# Altium PCB PCB1.PcbDoc (part 2 of 7)
Units mm, origin at the board's own origin, x right, y up, seen from the top; angles counter-clockwise.
Board outline 168 x 107.92 mm, 4 copper layers (Top Layer, POWER_LAYER, GND_LAYER, Bottom Layer), stack 1.182 mm thick; 507 components, 566 nets, 2495 pads, 1244 vias.
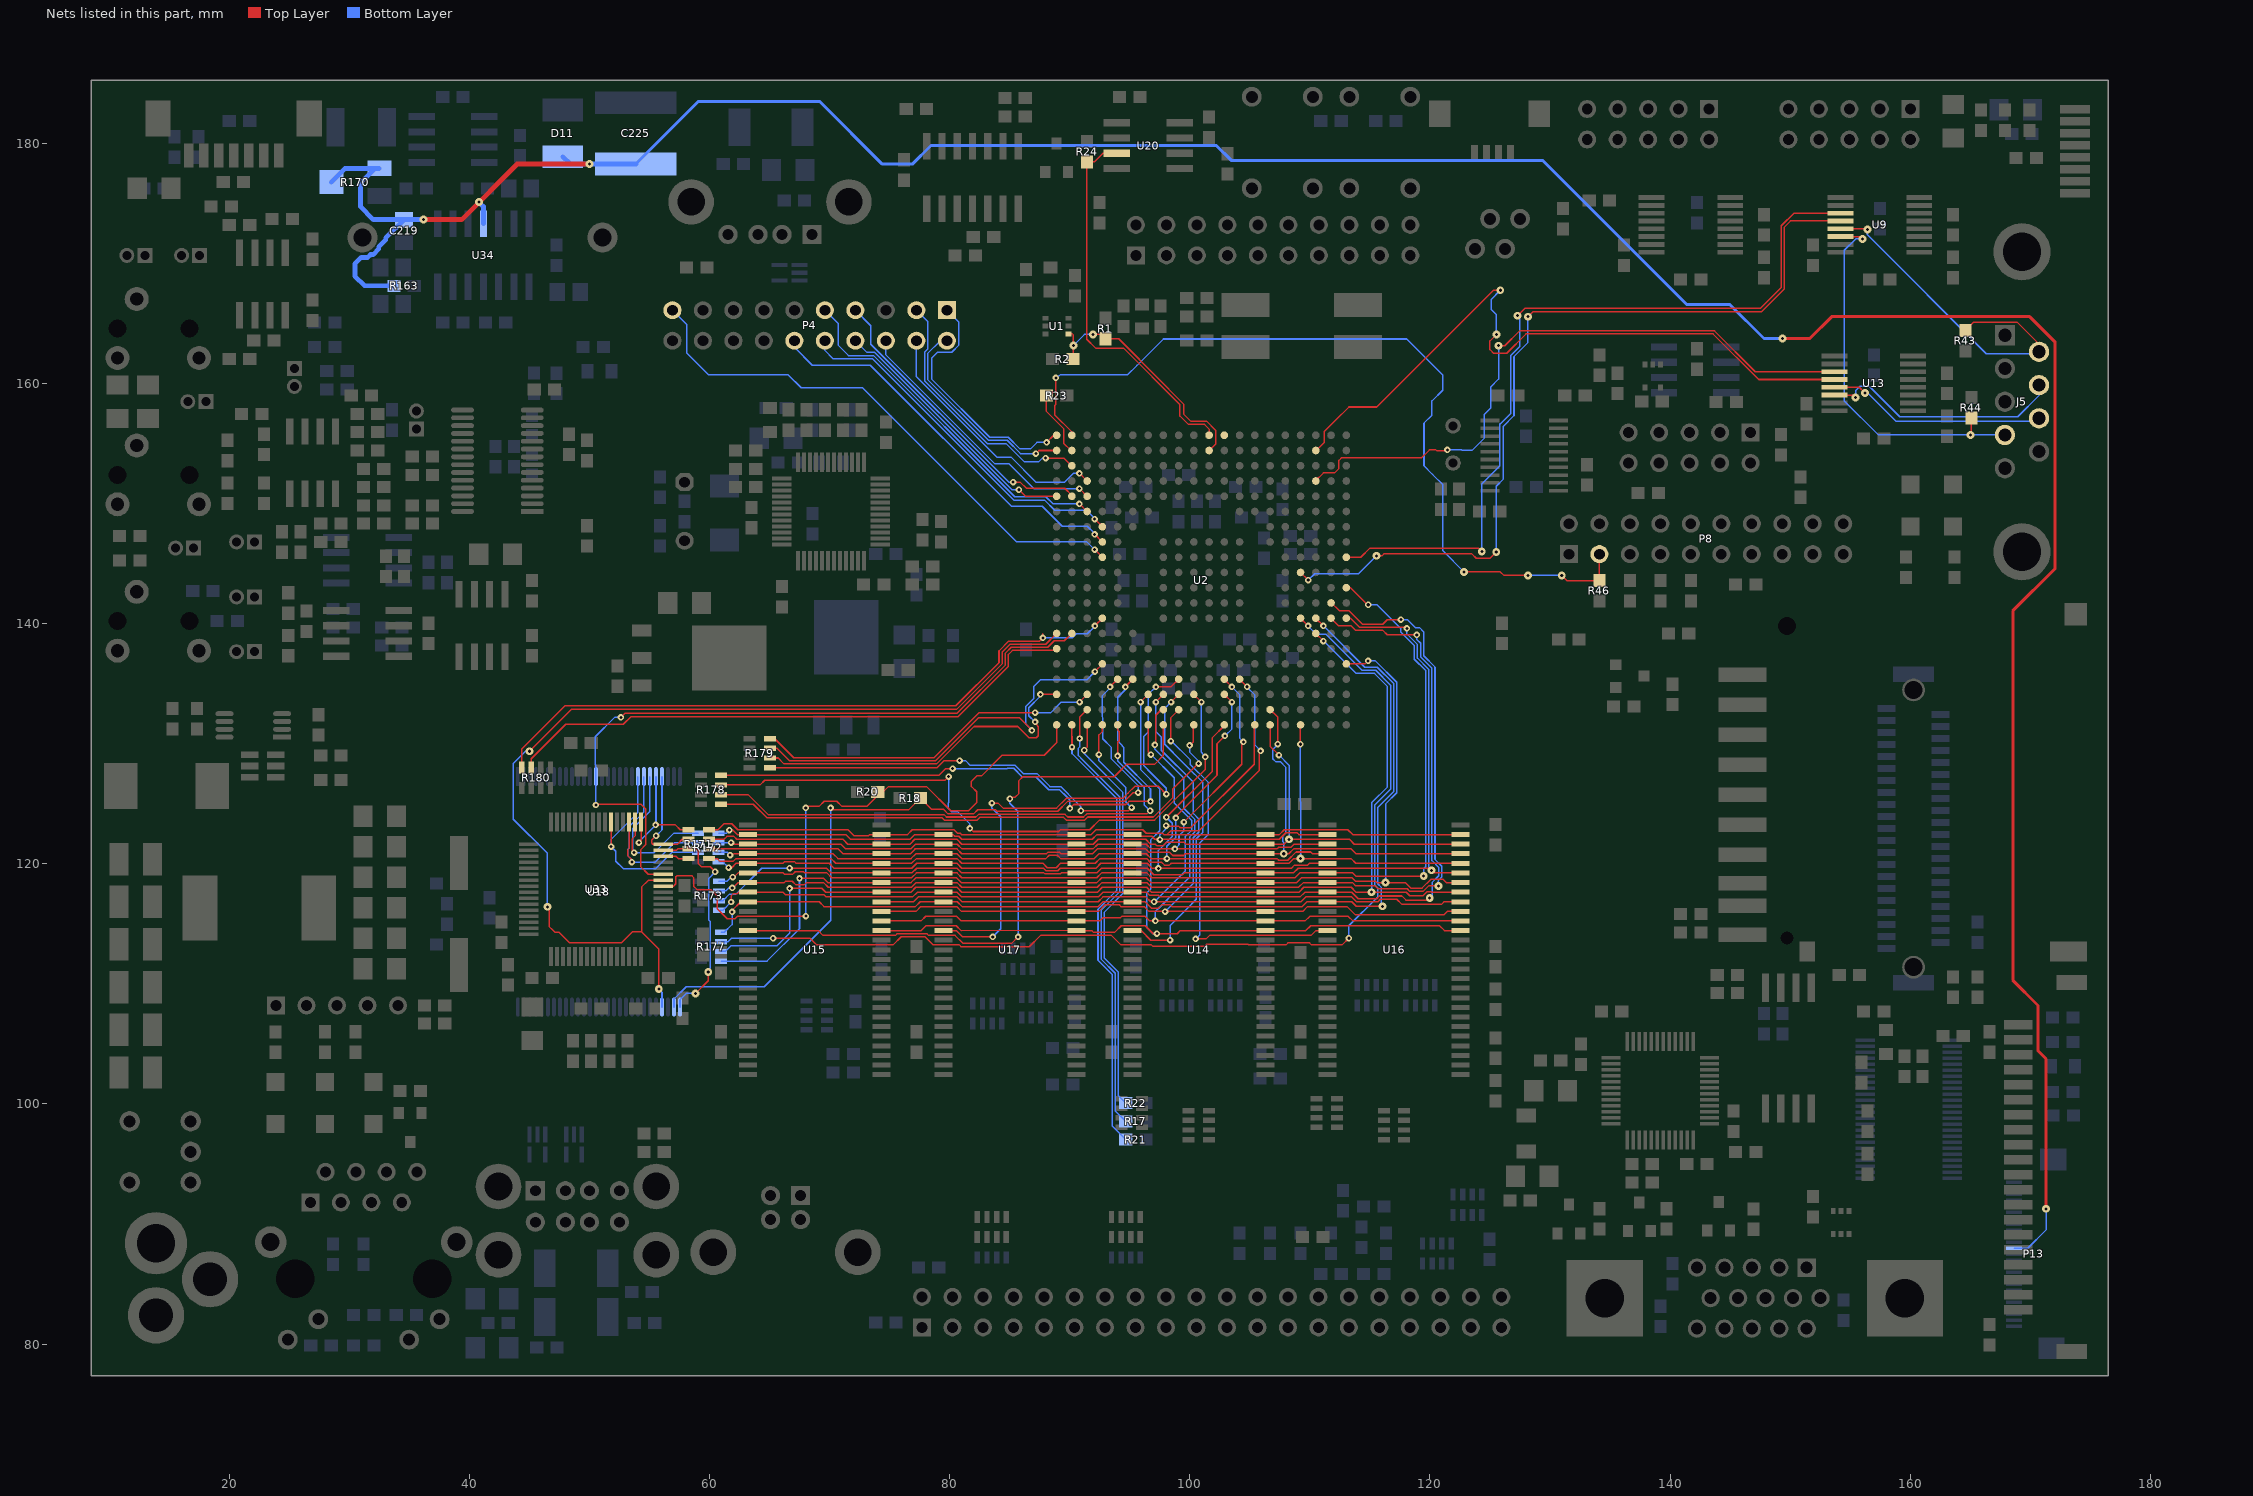
[diagram p4: the nets of this part, all layers, seen from the top]

## Footprints (in the part's own frame and the unit in brackets; to place one, negate y for a bottom-side part, rotate by r counter-clockwise, add the part's x,y. Pads: shape width x height; smd on the part's side, far side on the other; paste and mask are expansions set on the pad) (continued)
M08A [mm]
  rect 0.6x2.2 smd: 1(0.75,-3.25) 2(2.02,-3.25) 3(3.29,-3.25) 4(4.56,-3.25) 5(4.56,1.95) 6(3.29,1.95) 7(2.02,1.95) 8(0.75,1.95)
  silkscreen extent -0.23,-3.37 5.16,0.45
Micro6 [mm]
  rect 0.55x1.45 smd: 1(0.2,-2) 2(1.15,-2) 3(2.1,-2) 4(2.1,0.15) 5(1.15,0.15) 6(0.2,0.15)
  silkscreen extent -0.42,-2.28 2.7,-0.02
miniSMDC050 [mm]
  rect 1.8x3.15 smd: 1(0,0) 2(5.25,0)
  silkscreen extent 1.2,-1.45 4.05,1.45
MSOP8 [mm]
  rect 1.5x0.41 smd: 1(0,0)
  oval 1.5x0.41 smd: 2(0,-0.65) 3(0,-1.3) 4(0,-1.95) 5(4.8,-1.95) 6(4.8,-1.3) 7(4.8,-0.65) 8(4.8,0)
  silkscreen extent 1.39,-2.28 3.41,0.33
NSO8 [mm] "Small Outline; 8 Leads; Body Width 3.9 mm; Pitch 1.27 mm"
  rect 0.6x2.2 smd: 1(-1.905,-2.6) 2(-0.635,-2.6) 3(0.635,-2.6) 4(1.905,-2.6) 5(1.905,2.6) 6(0.635,2.6) 7(-0.635,2.6) 8(-1.905,2.6)
  silkscreen extent -2.88,-2.72 2.5,1.1
POT4MM-2 [mm] "Square Trimming Potentiometer"
  rect 2x1.3 smd: CCW(-2,-1.15) CW(-2,1.15)
  rect 2x2 smd: W(2,0)
  silkscreen extent -2.5,-2.5 2.5,2.5
PST-71AR1 [mm]
  round 1.7 hole 1: 1(-7.62,2.54) 2(-5.08,2.54) 3(-2.54,2.54) 4(-2.54,-2.54) 5(-7.62,-2.54)
  silkscreen extent -9.14,-6.35 -1.02,2.54
SC88 [mm]
  rect 0.4x0.5 smd: 1(-2.5,-0.15) 2(-1.85,-0.15) 3(-1.2,-0.15) 4(-1.2,1.75) 5(-1.85,1.75) 6(-2.5,1.75)
  silkscreen extent -3.02,-0.33 -0.7,1.52
SC88A [mm]
  rect 0.4x0.5 smd: 1(-5.1,-0.05) 2(-4.45,-0.05) 3(-3.8,-0.05) 4(-3.8,1.85) 5(-5.1,1.85)
  silkscreen extent -5.62,-0.22 -3.3,1.63
SCDA_NO2 [mm]
  rect 1.2x4 smd: 1(-0.659,-17.025) 2(1.841,-17.025) 3(4.341,-17.025) 4(6.841,-17.025) 5(9.341,-17.025) 6(11.841,-17.025) 7(14.191,-17.025) 8(16.091,-17.025) 9(-3.159,-17.025) 10(18.491,-17.025)
  rect 1.65x1.3 smd: 11(19.891,-11.625)
  rect 1.7x3.1 smd: 12(19.891,10.125)
  rect 1.9x1.9 smd: 13(-8.209,10.725)
  round 1.2 hole 1.5 unplated: SYSPAD14(-7.239,-13.335)
  round 0.8 hole 1.1 unplated: SYSPAD15(18.761,-13.335)
  silkscreen extent -8.56,-18.75 20.44,12.48
SO-G8/D6.6 [mm] "Small Outline; 8 Leads; Body Width 6.5 mm; Pitch 1.27 mm"
  rect 0.6x2.35 smd: 1(-1.905,-5.025) 2(-0.635,-5.025) 3(0.635,-5.025) 4(1.905,-5.025) 5(1.905,5.025) 6(0.635,5.025) 7(-0.635,5.025) 8(-1.905,5.025)
  silkscreen extent -3.3,-5.15 3.3,3.45
SOIC8N [mm] "Small Outline; 8 Leads; Body Width 3.9 mm; Pitch 1.27 mm"
  rect 0.6x2.2 smd: 1(-1.905,-2.625) 2(-0.635,-2.625) 3(0.635,-2.625) 4(1.905,-2.625) 5(1.905,2.625) 6(0.635,2.625) 7(-0.635,2.625) 8(-1.905,2.625)
  silkscreen extent -2.88,-2.79 2.5,1.13
SOT23 [mm] "SOT-23; 3 Leads; Body 3.0 x 2.5 mm, inc. leads (LxW max)"
  rect 0.85x1 smd: 1(-0.95,-1.2) 2(0.95,-1.2) 3(0,1.2)
  silkscreen extent -2.05,-1.32 1.27,1.2
SOT353 [mm]
  rect 0.35x1.35 smd: 1(-3.266,1.613) 2(-2.616,1.613) 3(-1.966,1.613) 4(-1.966,3.263) 5(-3.266,3.263)
  silkscreen extent -3.79,1.29 -1.47,3.14
SOT-23 [mm] "SOT-23; 3 Leads; Body 3.1 x 2.5 mm, inc. leads (LxW max)"
  rect 0.9x0.95 smd: 1(-0.95,-1.175) 2(0.95,-1.175) 3(0,1.175)
  silkscreen extent -2.07,-1.3 1.3,1.18
SSOP16 [mm] "SSOP; 16 Leads; Body Width 5.3 mm; Pitch 0.65 mm"
  rect 0.4x2.15 smd: 1(-2.275,-3.275) 2(-1.625,-3.275) 3(-0.975,-3.275) 4(-0.325,-3.275) 5(0.325,-3.275) 6(0.975,-3.275) 7(1.625,-3.275) 8(2.275,-3.275) 9(2.275,3.275) 10(1.625,3.275) 11(0.975,3.275) 12(0.325,3.275) 13(-0.325,3.275) 14(-0.975,3.275) 15(-1.625,3.275) 16(-2.275,3.275)
  silkscreen extent -3.25,-3.4 3.25,1.8
ST023 [mm]
  round 2 hole 1.1: 1(-4.99,2.54) 2(-4.99,-4.26) 3(-0.09,0.94)
  round 1.2 hole 1.5 unplated: MH1(-2.54,2.54) MH2(-2.54,-3.46)
  silkscreen extent -5.54,-5.46 0.46,3.74
SWBUTDIP4 [mm]
  round 1.65 hole 1: 1(0,0) 2(0,-5.08) 3(7.62,-5.08) 4(7.62,0)
  silkscreen extent 1.71,-5.02 5.91,0.04
TFDU_8PIN [mm]
  rect 0.7x2.5 smd: 1(-5,0) 2(-4,0) 3(-3,0) 4(-2,0) 5(-1,0) 6(0,0) 7(1,0) 8(2,0)
  silkscreen extent -6,-1 3,2.12
"TO-252-2 (D-PAK)" [mm]
  rect 1x1.6 smd: 1(0,0) 2(2.285,0) 3(4.57,0)
  rect 5.4x6.2 smd: 4(2.285,7.3)
  silkscreen extent -0.8,-0.7 5.37,10.3
TSOP28 [mm]
  rect 1.9x0.4 smd: 1(0,0)
  oval 1.9x0.4 smd: 2(0,-0.65) 3(0,-1.3) 4(0,-1.95) 5(0,-2.6) 6(0,-3.25) 7(0,-3.9) 8(0,-4.55) 9(0,-5.2) 10(0,-5.85) 11(0,-6.5) 12(0,-7.15) 13(0,-7.8) 14(0,-8.45) 15(5.8,-8.45) 16(5.8,-7.8) 17(5.8,-7.15) 18(5.8,-6.5) 19(5.8,-5.85) 20(5.8,-5.2) 21(5.8,-4.55) 22(5.8,-3.9) 23(5.8,-3.25) 24(5.8,-2.6) 25(5.8,-1.95) 26(5.8,-1.3) 27(5.8,-0.65) 28(5.8,0)
  silkscreen extent 1.78,-8.77 4.01,0.33
TSOP56 [mm]
  rect 1.6x0.3 smd: 1(0,0)
  oval 1.6x0.3 smd: 2(0,-0.5) 3(0,-1) 4(0,-1.5) 5(0,-2) 6(0,-2.5) 7(0,-3) 8(0,-3.5) 9(0,-4) 10(0,-4.5) 11(0,-5) 12(0,-5.5) 13(0,-6) 14(0,-6.5) 15(0,-7) 16(0,-7.5) 17(0,-8) 18(0,-8.5) 19(0,-9) 20(0,-9.5) 21(0,-10) 22(0,-10.5) 23(0,-11) 24(0,-11.5) 25(0,-12) 26(0,-12.5) 27(0,-13) 28(0,-13.5) 29(19.2,-13.5) 30(19.2,-13) 31(19.2,-12.5) 32(19.2,-12) 33(19.2,-11.5) 34(19.2,-11) 35(19.2,-10.5) 36(19.2,-10) 37(19.2,-9.5) 38(19.2,-9) 39(19.2,-8.5) 40(19.2,-8) 41(19.2,-7.5) 42(19.2,-7) 43(19.2,-6.5) 44(19.2,-6) 45(19.2,-5.5) 46(19.2,-5) 47(19.2,-4.5) 48(19.2,-4) 49(19.2,-3.5) 50(19.2,-3) 51(19.2,-2.5) 52(19.2,-2) 53(19.2,-1.5) 54(19.2,-1) 55(19.2,-0.5) 56(19.2,0)
  silkscreen extent 1.63,-13.75 17.56,0.25
TSSO12x8-48 [mm]
  rect 0.3x1.65 smd: 1(-5.25,-2.75) 2(-4.75,-2.75) 3(-4.25,-2.75) 4(-3.75,-2.75) 5(-3.25,-2.75) 6(-2.75,-2.75) 7(-2.25,-2.75) 8(-1.75,-2.75) 9(-1.25,-2.75) 10(-0.75,-2.75) 11(-0.25,-2.75) 12(0.25,-2.75) 13(0.75,-2.75) 14(1.25,-2.75) 15(1.75,-2.75) 16(2.25,-2.75) 17(2.75,-2.75) 18(3.25,-2.75) 19(3.75,-2.75) 20(4.25,-2.75) 21(4.75,-2.75) 22(5.25,-2.75) 23(5.75,-2.75) 24(6.25,-2.75) 25(6.25,4.5) 26(5.75,4.5) 27(5.25,4.5) 28(4.75,4.5) 29(4.25,4.5) 30(3.75,4.5) 31(3.25,4.5) 32(2.75,4.5) 33(2.25,4.5) 34(1.75,4.5) 35(1.25,4.5) 36(0.75,4.5) 37(0.25,4.5) 38(-0.25,4.5) 39(-0.75,4.5) 40(-1.25,4.5) 41(-1.75,4.5) 42(-2.25,4.5) 43(-2.75,4.5) 44(-3.25,4.5) 45(-3.75,4.5) 46(-4.25,4.5) 47(-4.75,4.5) 48(-5.25,4.5)
  silkscreen extent -6.07,-2.87 6.8,3.28
TSSOP2(0.44m) [mm]
  rect 0.416x1.5 smd: 1(-10.4,-5.55) 2(-9.6,-5.55) 3(-8.8,-5.55) 4(-8,-5.55) 5(-7.2,-5.55) 6(-6.4,-5.55) 7(-5.6,-5.55) 8(-4.8,-5.55) 9(-4,-5.55) 10(-3.2,-5.55) 11(-2.4,-5.55) 12(-1.6,-5.55) 13(-0.8,-5.55) 14(0,-5.55) 15(0.8,-5.55) 16(1.6,-5.55) 17(2.4,-5.55) 18(3.2,-5.55) 19(4,-5.55) 20(4.8,-5.55) 21(5.6,-5.55) 22(6.4,-5.55) 23(7.2,-5.55) 24(8,-5.55) 25(8.8,-5.55) 26(9.6,-5.55) 27(10.4,-5.55) 28(10.4,5.55) 29(9.6,5.55) 30(8.8,5.55) 31(8,5.55) 32(7.2,5.55) 33(6.4,5.55) 34(5.6,5.55) 35(4.8,5.55) 36(4,5.55) 37(3.2,5.55) 38(2.4,5.55) 39(1.6,5.55) 40(0.8,5.55) 41(0,5.55) 42(-0.8,5.55) 43(-1.6,5.55) 44(-2.4,5.55) 45(-3.2,5.55) 46(-4,5.55) 47(-4.8,5.55) 48(-5.6,5.55) 49(-6.4,5.55) 50(-7.2,5.55) 51(-8,5.55) 52(-8.8,5.55) 53(-9.6,5.55) 54(-10.4,5.55)
  silkscreen extent -11.33,-5.68 11.15,4.4
TSSOP20 [mm]
  rect 0.3x1.6 smd: 1(-2.5,-2.5) 2(-1.85,-2.5) 3(-1.2,-2.5) 4(-0.55,-2.5) 5(0.1,-2.5) 6(0.75,-2.5) 7(1.4,-2.5) 8(2.05,-2.5) 9(2.7,-2.5) 10(3.35,-2.5) 11(3.35,3.2) 12(2.7,3.2) 13(2.05,3.2) 14(1.4,3.2) 15(0.75,3.2) 16(0.1,3.2) 17(-0.55,3.2) 18(-1.2,3.2) 19(-1.85,3.2) 20(-2.5,3.2)
  silkscreen extent -3.32,-2.62 3.73,2

## Part data
B1: "CR2032 Battery holder"
C1 C2 C3 C4 C5 C8 C9 C10 C11 C12 C13 C14 C15 C16 C18 C19 C20 C21 C22 C24 C25 C26 C27 C28 C29 C30 C31 C32 C34 C35 C36 C37 C39 C40 C41 C42 C43 C45 C46 C47 C48 C51 C52 C53 C54 C55 C60 C61 C62 C65 C66 C71 C72 C75 C76 C77 C78 C79 C80 C81 C82 C83 C84 C85 C86 C87 C88 C89 C90 C91 C95 C96 C97 C98 C99 C100 C101 C102 C103 C104 C105 C106 C107 C108 C109 C110 C111 C112 C113 C114 C115 C116 C117 C118 C119 C120 C121 C122 C123 C124 C125 C126 C127 C128 C129 C130 C131 C132 C133 C135 C136 C137 C138 C139 C140 C141 C142 C143 C144 C145 C146 C149 C150 C151 C153 C154 C155 C156 C157 C158 C159 C160 C162 C165 C166 C167 C168 C171 C172 C173 C174 C175 C176 C177 C178 C183 C184 C185 C186 C187 C188 C189 C190 C191 C192 C194 C195 C196 C198 C199 C200 C201 C202 C203 C204 C205 C206 C207 C208 C209 C210 C212 C213 C214 C215 C216 C217 C218: library part C0603, "Ceramic Chip Capacitor - Standard"
C6 C17 C38 C49 C50 C56: library part C1210, "Ceramic Chip Capacitor - Standard"
C57 C58 C59 C63 C64 C67 C68 C69 C70 C73 C74 C92 C93 C94 C134 C152 C163 C164 C193 C197 C211: library part C1206, "Ceramic Chip Capacitor - Standard"
C147 C148 C161 C169 C170 C179 C180 C181 C182: library part "Cap Pol1", "Polarized Capacitor (Radial)"
C219 C220 C221 C222 C223 C225: "Polarized Capacitor (Surface Mount)"
C224: "Capacitor (Semiconductor SIM Model)"
D1 D2 D5 D6 D7: library part LED2, "Typical RED, GREEN, YELLOW, AMBER GaAs LED"
D3: library part 10MQ060N, "Schottky Rectifier"
D4: library part BAS40, "Schottky Barrier Diode"
D8 D9 D10: library part BAS40-04, "Schottky Barrier Double Diode"
D11: library part "D Schottky", "Schottky Diode"
F1 F2 F3: "miniSMDC050 Fuse component"
J1: "2.5mm Power Plug"
J2: "Molex 1.25 Wire to board"
J3: "USB 1.1, Right Angle, Thru-Hole, A Type, Receptacle, 4x4 Position, Stacked, Black"
J4: "USB 1.1, Right Angle, Thru-Hole, A Type, Receptacle, 4 Position, Black"
J5: "Receptacle Assembly, 9 Position, Right Angle"
J6: "Single RJ45 connector with integrated 10/100 BASE-TX magnetics and leds"
J7 J8 J9: library part PhoneJack, "3.5\" jack"
J10: "15pin DSUB High Density Female"
J11: library part KCAK4R, "Connector for ASTTouch Screen"
J12: "USB 1.1, Right Angle, Thru-Hole, B Type, Receptacle, 4 Position, Black"
J13: "FH12 Series, \"Flip-Lock\" SMT/ZIF Connector - 1.0mm Spaced Bottom Eccentric Contact"
J14: "1mm Pitch SMT VESA FPDI-1"
L1 L2 L4 L5 L6 L7 L8 L9: library part Inductor, "Inductor"
L3: library part CDRH127, "Sumida Power Inductor"
P2 P6 P7: "Header, 5-Pin, Dual row"
P3 P4 P8: "Header, 10-Pin, Dual row"
P5: "Header, 5-Pin"
P9: "Header, 20-Pin, Dual row"
P10: "Connector for SD Memory Card"
P12: "20PIN 1.25mm pitch"
Q1: "HEXFET Power MOSFET"
Q2: library part IRLML5103, "HEXFET Power MOSFET"
Q3: "NPN General-purpose Transistor"
R1 R2 R3 R4 R5 R6 R7 R8 R9 R10 R11 R12 R13 R14 R15 R16 R17 R18 R19 R20 R21 R22 R23 R24 R25 R26 R27 R28 R29 R30 R31 R32 R33 R34 R35 R36 R37 R38 R39 R40 R41 R42 R43 R44 R45 R46 R47 R48 R49 R50 R51 R52 R53 R54 R55 R56 R57 R58 R59 R60 R61 R62 R63 R64 R65 R66 R67 R68 R69 R70 R71 R72 R73 R77 R78 R79 R80 R81 R82 R83 R84 R85 R86 R87 R91 R92 R93 R94 R95 R96 R97 R98 R99 R100 R101 R102 R103 R104 R105 R106 R107 R108 R109 R110 R111 R112 R113 R114 R115 R116 R117 R118 R119 R120 R121 R122 R123 R124 R125 R126 R127 R128 R129 R130 R131 R132 R133 R134 R135 R136 R137 R138 R139 R140 R141 R142 R143 R144 R145 R146 R147 R148 R149 R150 R151 R152 R153 R154 R155 R156 R157 R158 R159 R160 R161 R162: library part Res3, "Resistor"
R74 R75 R76 R88 R89 R90 R171 R172 R173 R174 R175 R176 R177 R178 R179 R180 R181 R182 R183 R184 R185 R186 R187 R188 R189: library part CAY16-J4, "Chip Resistor Arrays"
R163 R164 R165 R166 R167 R168 R169: "Resistor"
R170: library part "RPot SM", "Square Trimming Potentiometer"
S2: "DIP Switch, 4 Position, SPST"
SW1 SW2: "DIP4 PushButton"
U1 U29: "TinyLogic UHS Dual Buffer"
U2: "32 Bit ARM920T Microcontroller with inegrated graphics, IDE, PCMCIA, Ethernet"
U3: "Serial Alarm Real-Time Clock"
U4: "Hysteretic PFET Buck Controller"
U5 U6: library part IRU1010, "1A low dropout positive fixed regulator"
U7 U9 U13: "±15kV ESD-Protected, 3.0V to 5.5V, Low-Power, up to 250kbps, True RS-232 Transceiver"
U8: "Fast Infrared Transceiver Module (FIR, 4 Mbit/s)"
U10 U11 U12: "EMI FILTER AND LINE TERMINATION  FOR USB DOWNSTREAM PORTS"
U14 U15 U16 U17: "32 Meg x 8 Synchronous DRAM"
U18: "Intel StrataFLASH"
U19: "MII PHY"
U20: library part DS1706LESA, "3.3 and 5.0 Volt MicroMonitor"
U21: "Quad 2-Input NAND Gate with Schmitt Trigger Inputs"
U22: "24-Bit, 192 kHz Stereo Audio CODEC"
U23: "3-Terminal Positive Regulator"
U24 U25 U27: library part MAX4242ESA, "Dual, +1.8V/10µA, SOT23, Beyond-the-Rails Op Amp"
U26: "Dual 105 mW Headphone Amplifier"
U28: "LVDS 18-Bit Color Flat Panel Display (FPD) Link"
U30: library part ADV7123, "Triple 10-Bit High Speed Video DAC"
U31: "TinyLogic UHS 2-Input OR Gate"
U32: "1Mbit High Speed SPI Serial Flash Memory"
U33: "Hi-Speed Universal Serial Bus peripheral controller"
U34: "Quad Low-Power Operational Amplifier"
U35: "DC-to-DC Converter Control Circuit"
Y1: library part QRZ_KX_MC, "QUARTZ CRYSTAL"
Y2 Y5: library part ECS-110-S-5P, "Crystal Oscillator"
Y3: library part QRZ_KX_12B, "QUARTZ CRYSTAL"
Y4: library part ECS-10-13-1, "Crystal Oscillator"

## Via types
v1: diameter 0.54, hole 0.254, Top Layer to Bottom Layer, tented both sides, 504 vias
v2: diameter 0.65, hole 0.254, Top Layer to Bottom Layer, 387 vias
v3: diameter 0.65, hole 0.254, Top Layer to Bottom Layer, tented both sides, 325 vias
v4: diameter 0.54, hole 0.254, Top Layer to Bottom Layer, 25 vias
v5: diameter 1.27, hole 0.75, Top Layer to Bottom Layer, 2 vias
v6: diameter 0.65, hole 0.254, Top Layer to Bottom Layer, tented bottom, 1 vias

## Nets (pads, with @x,y where several pads share a name; then routed paths per layer and width w, separated by ;. In a path a pad name is that pad's centre, name@x,y a point inside that pad or via, vN(x,y) a via of type N, cw(c..) or ccw(c..) an arc to the next point about the centre after c; other vN are vias at no path point)
25V: C219.1 C225.1 D11.2 P13.12 R163.2 R170.CW R170.W U34.4 | length 259.8
  Top Layer w0.25: v2(149.36,163.76) 151.64,163.76 153.46,165.58 169.96,165.58 172.08,163.46 172.08,144.6 168.556,141.076 168.556,110.304 170.66,108.2 170.66,104.42 171.32,103.76 v2(171.32,91.26)
  Top Layer w0.4: v2(36.17,173.67) 39.33,173.67 43.958,178.298 v2(49.98,178.298)
  Bottom Layer w0.127: P13.12@168.656,87.972 169.792,87.972 171.32,89.5 v2(171.32,91.26)
  Bottom Layer w0.25: C225.1@53.848,178.298 59.07,183.52 69.14,183.52 74.38,178.28 76.88,178.28 78.44,179.84 102.2,179.84 103.44,178.6 129.38,178.6 141.38,166.6 144.98,166.6 147.82,163.76 v2(149.36,163.76)
  Bottom Layer w0.4: R170.W@28.48,176.784 29.63,177.934 R170.CW@32.48,177.934 ; R170.CW@32.154,177.934 30.9,176.68 30.9,174.76 31.99,173.67 v2(36.17,173.67) v2@36.2,173.7 ; R163.2@33.694,168.148 31.252,168.148 30.44,168.96 30.44,169.98 30.98,170.52 31.52,170.52 31.75,170.75 31.97,170.75 32.439,171.219 32.439,171.393 33.02,171.974 33.02,172.146 C219.1@34.544,173.67 ; v2(40.78,175.12) 41.148,174.752 U34.4@41.148,173.313 ; D11.2@47.752,178.898 47.762,178.898 48.362,178.298 C225.1@53.848,178.298
#CAS: U2.H2 U14.17 U15.17 U16.17 U17.17 | length 70
  Top Layer w0.127: U15.17@74.302,115.24 77.6,115.24 78,115.64 80.56,115.64 80.96,115.24 U17.17@90.558,115.24 92.5,115.24 92.78,115.52 94.22,115.52 94.34,115.64 96.26,115.64 96.66,115.24 U14.17@106.306,115.24 109.6,115.24 110,115.64 113.18,115.64 113.58,115.24 U16.17@122.562,115.24 ; v1(97.08,129.9) 97.16,129.98 97.16,132.38 97.622,132.842 U2.H2@97.79,132.842
  Bottom Layer w0.127: v1(97.08,129.9) 97.08,129.56 99.492,127.148 99.492,124.629 100.42,123.701 100.42,122.678 100.008,122.266 100.008,118.928 98.82,117.74 ; v1(97.12,115.24) 97.12,116.02 97.484,116.384 98.83,117.73
#CS0: U2.M20 | length 0
  Top Layer w0.127: U2.M20@102.838,155.702 U2.M20@102.87,155.702
#CS1: R22.1 U2.C1 | length 34.3
  Top Layer w0.127: v1(91.2,129.46) 91.44,129.7 U2.C1@91.44,131.572
  Bottom Layer w0.127: v1(91.2,129.46) 91.2,129.18 91.8,128.58 ; 91.799,128.579 94.398,125.98 94.398,117.5 92.854,115.956 92.854,112.182 94.04,110.996 94.04,100.69 R22.1@94.654,100.076
#CS2: R21.1 U2.B1 | length 37.7
  Top Layer w0.127: U2.B1@90.17,131.572 v1(90.18,129.72)
  Bottom Layer w0.127: v1(90.18,129.72) 90.18,129.18 93.89,125.47 93.89,117.768 92.346,116.224 92.346,111.972 93.532,110.786 93.532,98.15 R21.1@94.654,97.028
#CS3: R17.1 U2.C2 | length 37.6
  Top Layer w0.127: v1(90.82,130.44) 90.82,132.24 91.422,132.842 U2.C2@91.44,132.842 U2.C2@91.44,132.76
  Bottom Layer w0.127: v1(90.82,130.44) 90.82,129.739 90.72,129.639 90.72,129.02 91.02,128.72 91.02,128.718 94.144,125.594 94.144,117.663 92.6,116.119 92.6,112.077 93.786,110.891 93.786,99.42 R17.1@94.654,98.552
#CS6: R18.1 U2.E4 U18.30 | length 64.4
  Top Layer w0.127: v1(70.08,124.66) 70.22,124.52 76.6,124.52 77.556,125.476 R18.1@77.558,125.476 78.502,124.532 79.488,124.532 79.86,124.16 81.98,124.16 82.32,124.5 83.8,124.5 83.92,124.38 88.998,124.38 89.815,125.196 94.536,125.196 95.28,125.94 v1(95.68,125.94) ; v1(93.35,134.744) 93.35,134.752 U2.E4@93.98,135.382
  Bottom Layer w0.127: U18.30@57.026,108.073 57.026,108.746 58.04,109.76 64.54,109.76 70.08,115.3 v1(70.08,124.66) ; v1(93.35,134.744) 93.35,134.65 92.72,134.02 92.74,130.42 93.46,129.7 93.46,128.74 95.68,126.52 v1(95.68,125.94)
#CS7: R20.1 U2.A1 U33.25 | length 52.5
  Top Layer w0.127: U33.25@56.13,118.137 56.977,118.137 57.18,118.34 57.18,118.92 57.28,119.02 58.5,119.02 58.66,118.86 58.66,118.14 58.94,117.86 60.08,117.86 60.62,117.32 60.62,116.26 61.46,115.42 62.1,115.42 62.32,115.64 v1(68.02,115.64) ; v1(68,124.66) 68.127,124.787 69.106,124.787 69.539,125.22 70.58,125.22 71.014,124.786 73.088,124.786 R20.1@74.002,125.7 ; R20.1@74.002,125.984 74.444,125.984 74.9,126.44 78.06,126.44 80.08,124.42 81.56,124.42 82.24,125.1 82.24,126 81.8,126.44 81.8,126.881 82.239,127.32 82.631,127.32 84.355,129.044 87.865,129.044 88.9,130.079 U2.A1@88.9,131.572
  Bottom Layer w0.127: v1(68,124.66) 68.02,123.96 v1(68.02,115.64)
#CTS0: U2.V19 U13.12 | length 58.1
  Top Layer w0.127: U2.V19@110.49,154.432 110.532,154.432 111.18,155.08 111.18,155.99 112.093,156.903 113.246,158.056 115.576,158.056 125.3,167.78 v3(125.86,167.78) ; v3(125.54,164.1) 125,163.56 125,162.84 125.3,162.54 126.4,162.54 127.998,164.138 143.588,164.138 147.381,160.345 U13.12@153.697,160.345
  Bottom Layer w0.127: v3(125.54,164.1) 125.54,165.741 125.1,166.181 125.1,167.02 v3(125.86,167.78)
#CTS0-RS232: J5.8 U13.13 | length 18.3
  Top Layer w0.127: U13.13@153.697,159.695 155.765,159.695 v3(156.24,159.22)
  Bottom Layer w0.127: v3(156.24,159.22) 156.46,159.22 158.8,156.88 170.505,156.88 J5.8@170.736,157.111
#DQM0: U2.J2 U16.39 | length 32.5
  Top Layer w0.127: v1(98.42,130.22) 98.42,132.18 99.06,132.82 U2.J2@99.06,132.842 ; v1(100.48,113.74) 101.34,113.74 101.64,114.04 110.1,114.04 110.5,114.44 U16.39@111.462,114.44
  Bottom Layer w0.127: v1@98.52,130.12 v1(98.42,130.22) 98.48,130.22 100.02,128.68 100.02,128.3 101.54,126.78 101.54,122.46 100.84,121.76 100.84,114.1 v1(100.48,113.74)
#DQM1: U2.J3 U14.39 | length 26.9
  Top Layer w0.127: U14.39@95.206,114.44 95.94,114.44 96.74,113.64 v1(98.36,113.64) ; v1(98.43,133.474) 98.43,133.482 U2.J3@99.06,134.112
  Bottom Layer w0.127: v1(98.36,113.64) 98.36,114.86 99.746,116.246 100.54,117.04 100.54,122.08 101.092,122.632 101.092,126.768 99.766,128.094 99.367,128.493 97.9,129.96 97.9,132.94 98.43,133.47 v1(98.43,133.474)
#DQM2: U2.J4 U17.39 | length 44.1
  Top Layer w0.127: U17.39@79.458,114.44 80.54,114.44 81.06,113.92 v1(83.58,113.92) ; v1(83.5,125.06) 84.02,125.06 84.44,124.64 88.899,124.64 89.71,125.45 94.41,125.45 94.851,125.891 94.854,125.891 95.426,126.464 97.376,126.464 v1(98.04,125.8) ; v1(97.16,134.74) 97.164,134.744 98.43,134.744 98.43,134.752 U2.J4@99.06,135.382
  Bottom Layer w0.127: v1(83.5,125.06) 83.5,124.66 84.246,123.914 84.246,114.586 v1(83.58,113.92) ; v1(97.16,134.74) 96.52,134.1 96.52,130.96 96.144,130.584 96.144,128.206 96.495,127.855 96.495,127.845 98.04,126.3 v1(98.04,125.8)
#DQM3: U2.H1 U15.39 | length 52.5
  Top Layer w0.127: U15.39@63.202,114.44 69.04,114.44 69.44,114.04 75.48,114.04 75.626,114.186 78.074,114.186 78.22,114.04 80.44,114.04 81.08,113.4 85.18,113.4 v1(85.7,113.92) ; v1(85,125.42) 85.14,125.56 85.452,125.56 85.76,125.868 85.76,126.94 86.08,127.26 93.7,127.26 94.37,127.93 ; 94.37,127.93 94.72,128.281 97.051,128.281 97.79,129.02 U2.H1@97.79,131.572
  Bottom Layer w0.127: v1(85,125.42) 85,125.041 85.66,124.381 85.66,124.34 v1(85.7,113.92)
#DSR0: U2.U11 U9.12 | length 70.9
  Top Layer w0.127: U2.U11@109.22,144.272 109.22,144.28 109.224,144.276 v1(109.86,143.64) ; v3(115.54,145.66) 116,145.66 116.16,145.82 123.5,145.82 123.86,145.46 125,145.46 v3(125.52,145.98) ; v3(128.16,165.58) 128.56,165.98 147.6,165.98 149.524,167.904 149.524,173.046 150.031,173.553 U9.12@154.205,173.553
  Bottom Layer w0.127: v1(109.86,143.64) 110.4,144.16 114.04,144.16 v3(115.54,145.66) ; v3(125.52,145.98) 125.52,151.46 126.12,152.06 126.12,156.46 127,157.34 127,162.26 128.16,163.42 v3(128.16,165.58)
#DSR0-RS232: J5.6 R43.2 U9.13 | length 29
  Top Layer w0.127: U9.13@154.205,172.903 156.377,172.903 v3(156.44,172.84) ; R43.2@164.592,164.426 165.266,165.1 168.942,165.1 170.736,163.306 J5.6@170.736,162.651
  Bottom Layer w0.127: v3(156.44,172.84) 156.44,172.4 166.34,162.5 170.585,162.5 J5.6@170.736,162.651
#DTR0: U2.Y12 U9.11 | length 66.2
  Top Layer w0.127: U2.Y12@113.03,145.542 114.242,145.542 115.004,146.304 124.036,146.304 v3(124.32,146.02) ; v3(127.3,165.66) 127.92,166.28 147.54,166.28 149.27,168.01 149.27,173.152 150.321,174.203 U9.11@154.205,174.203
  Bottom Layer w0.127: v3(124.32,146.02) 124.32,151.64 125.82,153.14 125.82,156.66 125.866,156.66 126.746,157.54 126.746,162.365 127.46,163.079 127.46,165.4 v3(127.3,165.66)
#DTR0-RS232: J5.4 R44.2 U9.14 | length 32.3
  Top Layer w0.127: U9.14@154.205,172.253 155.827,172.253 v3(156.02,172.06) ; v3(165.02,155.726) 165.1,155.806 R44.2@165.1,157.138
  Bottom Layer w0.127: v3(156.02,172.06) 155.46,172.06 154.52,171.12 154.52,158.56 157.354,155.726 J5.4@167.896,155.726
#IORD: P4.6 U2.C16 | length 22.8
  Top Layer w0.127: v1(90.8,151.26) 90.802,151.26 U2.C16@91.44,150.622
  Bottom Layer w0.127: P4.6@74.676,163.576 74.676,162.393 83.729,153.34 84.92,153.34 87,151.26 v1(90.8,151.26)
#IOWR: P4.2 U2.A19 | length 17.6
  Top Layer w0.127: v1(87.18,154.18) 87.432,154.432 U2.A19@88.9,154.432
  Bottom Layer w0.127: P4.2@79.756,163.576 79.215,163.576 78.154,162.515 78.154,160.352 83.23,155.276 84.784,155.276 85.88,154.18 v1(87.18,154.18)
#MCADEN: P4.10 U2.D14 | length 30
  Top Layer w0.127: v1(92.07,148.72) 92.072,148.72 U2.D14@92.71,148.082
  Bottom Layer w0.127: P4.10@69.596,163.576 69.596,162.764 70.283,162.077 73.555,162.077 85.332,150.3 87.898,150.3 88.738,149.46 91.38,149.46 92.07,148.77 v1(92.07,148.72)
#MCDAEN: P4.12 U2.D13 | length 33
  Top Layer w0.127: v1(92.07,147.45) 92.708,146.812 U2.D13@92.71,146.812
  Bottom Layer w0.127: P4.12@67.056,163.576 67.056,163.024 68.54,161.54 73.374,161.54 73.879,161.034 85.134,149.78 87.7,149.78 89.36,148.12 91.46,148.12 92.07,147.51 v1(92.07,147.45)
#MCEH: P4.7 U2.B16 | length 25.4
  Top Layer w0.127: v1(85.28,151.8) 85.86,151.8 86.38,151.28 89.58,151.28 90.17,150.69 U2.B16@90.17,150.622
  Bottom Layer w0.127: P4.7@72.136,166.116 73.42,164.832 73.42,163.29 84.91,151.8 v1(85.28,151.8)
#MCEL: P4.9 U2.C15 | length 29.8
  Top Layer w0.127: v1(90.8,149.99) 90.802,149.99 U2.C15@91.44,149.352
  Bottom Layer w0.127: P4.9@69.596,166.116 70.72,164.992 70.72,163.18 71.56,162.34 73.651,162.34 85.411,150.58 88,150.58 88.59,149.99 v1(90.8,149.99)
#MCRD: P4.3 U2.B18 | length 21.9
  Top Layer w0.127: v1(87.98,153.8) 89.5,153.8 90.138,153.162 U2.B18@90.17,153.162
  Bottom Layer w0.127: P4.3@77.216,166.116 78.18,165.152 78.18,162.9 77.9,162.62 77.9,160.247 83.164,154.983 84.714,154.983 86.217,153.48 87.4,153.48 87.72,153.8 v1(87.98,153.8)
#MCREG: P4.8 U2.A16 | length 22.1
  Top Layer w0.127: v1(85.76,151.16) 86.298,150.622 U2.A16@88.9,150.622
  Bottom Layer w0.127: P4.8@72.136,163.576 73.112,162.6 73.751,162.6 85.191,151.16 v1(85.76,151.16)
#MCRESET: P4.1 U2.A20 | length 21.1
  Top Layer w0.127: v1(88.06,155.1) 88.662,155.702 U2.A20@88.9,155.702
  Bottom Layer w0.127: P4.1@79.756,166.116 80.76,165.112 80.76,163.22 80.16,162.62 78.978,162.62 78.513,162.156 78.513,160.352 83.325,155.54 84.879,155.54 85.859,154.56 86.72,154.56 87.26,155.1 v1(88.06,155.1)
#MCWAIT: P4.19 U2.D12 | length 45.7
  Top Layer w0.127: v1(92.07,146.18) 92.072,146.18 U2.D12@92.71,145.542
  Bottom Layer w0.127: P4.19@56.896,166.116 58.1,164.912 58.1,162.54 59.889,160.751 66.534,160.751 67.625,159.66 72.739,159.66 85.579,146.82 91.42,146.82 92.06,146.18 v1(92.07,146.18)
#MCWR: P4.4 U2.C17 | length 21.5
  Top Layer w0.127: v1(90.8,152.53) 90.802,152.53 U2.C17@91.44,151.892
  Bottom Layer w0.127: P4.4@77.216,163.576 77.216,160.571 83.907,153.88 85.098,153.88 87.21,151.768 89.534,151.768 90.296,152.53 v1(90.8,152.53)
#POR: R24.1 U2.L20 U20.7 | length 31.9
  Top Layer w0.127: U20.7@93.895,179.197 92.757,179.197 92.034,178.474 R24.1@91.44,178.474 91.4,178.434 91.4,163.704 92.144,162.96 94.46,162.96 99.174,158.246 99.174,157.306 99.881,156.599 101.221,156.599 101.6,156.22 U2.L20@101.6,155.702
#RAS: U2.H3 U14.18 U15.18 U16.18 U17.18 | length 70.6
  Top Layer w0.127: U15.18@74.302,116.04 77.18,116.04 77.58,116.44 80.58,116.44 80.98,116.04 81.16,116.04 92.38,116.04 92.926,116.586 94.114,116.586 94.26,116.44 96.2,116.44 96.6,116.04 97.94,116.04 109.4,116.04 109.8,116.44 113.1,116.44 113.8,115.74 121.14,115.74 121.44,116.04 U16.18@122.562,116.04 ; v1(97.16,133.48) 97.79,134.11 U2.H3@97.79,134.112
  Bottom Layer w0.127: v1(97.16,133.48) 97.16,131.02 97.62,130.56 97.62,129.46 100.292,126.788 100.292,124.188 100.74,123.74 100.74,122.639 100.28,122.179 100.28,118.36 v1(97.94,116.02)
#RD: U2.A7 U18.32 U33.26 | length 86.5
  Top Layer w0.127: v3(44.98,129.38) 48.46,132.86 80.562,132.86 84.354,136.652 84.354,137.634 85.008,138.288 87.996,138.288 U2.A7@88.9,139.192 ; v3(46.482,116.421) 46.622,116.281 46.622,114.781 46.898,114.505 47.102,114.301 47.442,114.301 48.322,113.421 52.642,113.421 53.562,114.341 54.322,114.341 ; v3(55.76,109.58) 55.742,109.598 55.742,112.921 54.322,114.341 ; U33.26@56.13,118.637 54.886,118.637 54.882,118.641 54.882,118.621 54.322,118.061 54.322,114.341
  Bottom Layer w0.127: v3(44.98,129.38) 44.66,129.38 43.64,128.36 43.64,123.72 46.482,120.878 v3(46.482,116.421) ; v3(55.76,109.58) 56.026,109.314 U18.32@56.026,108.073
#RSTO: R1.1 R2.1 U1.1 U2.L19 | length 20.4
  Top Layer w0.127: U1.1@89.874,164.144 90.21,164.144 90.3,164.054 90.3,162.094 R2.1@90.258,162.052 ; v3(91.94,164.1) 92.606,164.1 R1.1@92.964,163.742 94.078,163.742 94.58,163.24 99.48,158.3 99.48,157.48 ; 99.47,157.47 100.06,156.88 101.38,156.88 102.14,156.12 102.14,154.96 101.612,154.432 U2.L19@101.6,154.432
  Bottom Layer w0.127: v3(90.3,163.18) 91.22,164.1 v3(91.94,164.1)
#RTS0: U2.V17 U13.11 | length 54.1
  Top Layer w0.127: U2.V17@110.49,151.892 110.49,151.93 111.12,152.56 112.04,152.56 112.42,152.94 112.42,153.6 112.66,153.84 119.32,153.84 119.96,154.48 120.491,154.48 120.576,154.395 121.375,154.395 v1(121.46,154.48) ; v3(125.72,163.16) 126.234,163.16 127.466,164.392 143.71,164.392 147.107,160.995 U13.11@153.697,160.995
  Bottom Layer w0.127: v1(121.46,154.48) 122.64,154.48 122.68,154.44 123.5,154.44 124.54,155.48 124.54,157.455 125.08,157.995 125.08,159.74 125.72,160.38 v3(125.72,163.16)
#RTS0-RS232: J5.7 U13.14 | length 20.5
  Top Layer w0.127: U13.14@153.697,159.045 155.255,159.045 v3(155.46,158.84)
  Bottom Layer w0.127: v3(155.46,158.84) 155.46,159.42 155.82,159.78 156.6,159.78 159.14,157.24 168.96,157.24 170.736,159.016 J5.7@170.736,159.881
#SDCS0: U2.G1 U14.19 U15.19 U16.19 U17.19 | length 67.2
  Top Layer w0.127: U15.19@74.302,116.84 76.98,116.84 77.38,117.24 80.62,117.24 81.02,116.84 92.36,116.84 92.76,117.24 96.34,117.24 96.74,116.84 109.26,116.84 109.66,117.24 113.48,117.24 113.88,116.84 115.665,116.84 115.865,117.04 117.24,117.04 117.66,116.62 120.96,116.62 121.18,116.84 U16.19@122.562,116.84 ; U2.G1@96.52,131.572 96.52,129.34 v1(96.76,129.1)
  Bottom Layer w0.127: v1(96.76,129.1) 98.692,127.168 98.692,125.07 100.166,123.596 100.166,122.826 99.624,122.284 99.624,119.404 97.06,116.84 v1(97.02,116.84)
#SDCS1: U2.G2 | length 0
  Top Layer w0.127: U2.G2@96.502,132.842 U2.G2@96.52,132.842 U2.G2@96.52,132.82
#SDCS2: U2.H4
#SDCS3: U2.F1
#SDWE: U2.G3 U14.16 U15.16 U16.16 U17.16 | length 71.4
  Top Layer w0.127: U15.16@74.302,114.44 77.619,114.44 78.019,114.84 80.54,114.84 80.94,114.44 U17.16@90.558,114.456 ; U17.16@90.558,114.44 91.82,114.44 91.94,114.32 93.76,114.32 94.28,114.84 96.28,114.84 96.94,114.18 98.94,114.18 99.2,114.44 U14.16@106.306,114.44 109.66,114.44 110.06,114.84 120.8,114.84 121.2,114.44 U16.16@122.562,114.44 ; v1@95.89,133.482 U2.G3@96.52,134.112
  Bottom Layer w0.127: v1(95.89,133.474) 95.89,127.849 97.499,126.24 97.499,122.759 96.76,122.02 96.76,117.92 96.4,117.56 96.4,114.7 96.92,114.18 v1(97.26,114.18)
#TRST: P8.3 R46.1 U2.B20 | length 72.5
  Top Layer w0.127: v1@88.84,160.62 88.84,158.28 88.74,158.18 88.74,157.4 90.17,155.97 U2.B20@90.17,155.702 ; v3(122.84,144.32) 125.86,144.32 126.16,144.02 v3(128.16,144.02) ; v3(130.98,144.02) 131.402,143.598 R46.1@134.112,143.598 P8.3@134.112,145.796
  Bottom Layer w0.127: v1(88.84,160.48) 89.207,160.753 94.834,160.753 95.594,161.514 97.801,163.72 118.06,163.72 121.06,160.72 121.06,159.452 120.162,158.554 120.162,157.372 119.504,156.714 119.504,153.156 120.221,152.439 121.085,151.575 121.085,146.075 v3(122.84,144.32) ; v3(128.16,144.02) v3(130.98,144.02)
#WAIT: R23.2 U2.B19 | length 5.5
  Top Layer w0.127: R23.2@88.05,159.004 88.05,157.69 89.48,156.26 89.48,155.04 90.088,154.432 U2.B19@90.17,154.432
#WR: U2.B7 U18.14 U33.27 | length 61
  Top Layer w0.127: v1(50.52,124.9) 50.58,124.96 54.28,124.96 54.66,124.58 54.66,121.58 54.24,121.16 54.24,119.782 54.886,119.137 U33.27@56.13,119.137 ; v1(52.6,132.2) 52.94,132.54 80.601,132.54 84.631,136.571 84.631,137.551 85.114,138.034 88.154,138.034 88.7,138.58 89.54,138.58 90.152,139.192 U2.B7@90.17,139.192
  Bottom Layer w0.127: v1(50.52,124.9) 50.524,127.273 50.526,128.234 50.46,128.3 50.46,130.58 52.08,132.2 v1(52.6,132.2)
A0: R171.1 U2.U1 U14.23 U15.23 U16.23 U17.23 | length 75.5
  Top Layer w0.127: R171.1@59.944,120.44 60.62,120.44 60.86,120.2 61.94,120.2 62.18,120.44 70.1,120.44 70.5,120.04 76.82,120.04 77.22,120.44 80.6,120.44 81,120.04 87.76,120.04 88.12,119.68 88.872,119.68 89.232,120.04 92.12,120.04 92.52,120.44 96.402,120.44 96.702,120.14 97.632,120.14 97.878,119.894 98.294,119.894 98.44,120.04 U14.23@106.306,120.04 108.259,120.04 108.659,120.44 113.42,120.44 113.82,120.04 U16.23@122.562,120.04 ; v1(109.2,129.96) U2.U1@109.2,131.552
  Bottom Layer w0.127: v1(109.2,129.96) v3(109.22,120.44)
A1: R171.2 U2.R2 U14.24 U15.24 U16.24 U17.24 | length 77.3
  Top Layer w0.127: R171.2@59.944,121.24 61.6,121.24 70.7,121.24 71.1,120.84 76.72,120.84 77.1,121.22 ; 77.1,121.24 80.6,121.24 81,120.84 88.049,120.84 88.189,120.98 89.12,120.98 ; 89.114,120.986 89.26,120.84 91.878,120.84 92.278,121.24 96.32,121.24 96.58,120.98 98.28,120.98 98.566,120.694 99.474,120.694 99.62,120.84 108.239,120.84 108.639,121.24 113.44,121.24 113.84,120.84 U16.24@122.562,120.84 ; U2.R2@106.68,132.842 106.698,132.842 107.32,132.22 v1(107.32,129.98)
  Bottom Layer w0.127: v1(107.32,129.98) 107.32,129.94 106.903,129.523 106.903,128.757 107.143,128.517 107.523,128.517 108.006,128.034 108.006,122.586 107.74,122.32 107.74,121.851 107.82,121.771 v3(107.82,120.84)
A2: R171.3 U2.R1 U14.25 U15.25 U16.25 U17.25 | length 74.4
  Top Layer w0.127: R171.3@59.944,122.04 61.2,122.04 61.44,122.28 62.02,122.28 62.26,122.04 71.1,122.04 71.5,121.64 76.68,121.64 77.08,122.04 80.6,122.04 81,121.64 91.96,121.64 92.36,122.04 96.32,122.04 96.72,121.64 97.12,121.64 97.266,121.494 97.754,121.494 ; 97.754,121.514 98.026,121.786 99.534,121.786 99.68,121.64 107.84,121.64 v3(108.26,122.04) 113.3,122.04 113.7,121.64 U16.25@122.562,121.64 ; U2.R1@106.68,131.572 106.68,129.8 v1(107.42,129.06)
  Bottom Layer w0.127: v1(107.42,129.06) 108.26,128.22 v3(108.26,122.04)
A3: R171.4 U2.N4 U14.26 U15.26 U16.26 U17.26 | length 82.5
  Top Layer w0.127: R171.4@59.944,122.84 60.68,122.84 61.18,123.34 61.84,123.34 62.34,122.84 71.52,122.84 72.04,122.32 73.2,122.32 73.32,122.44 76.48,122.44 76.88,122.84 79.64,122.84 80.36,122.84 ; 80.36,122.838 80.65,122.548 80.866,122.548 80.974,122.44 91.78,122.44 92.18,122.84 96.02,122.84 96.08,122.84 96.366,122.554 97.702,122.554 97.816,122.44 U14.26@106.306,122.44 ; 98.1,122.44 98.4,122.74 100.74,122.74 105.78,127.78 105.78,129.2 v1(105.9,129.4) ; U2.N4@104.14,135.382 v1@104.77,134.752 ; U14.26@106.306,122.44 107.46,122.44 107.86,122.84 113.16,122.84 113.56,122.44 U16.26@122.562,122.44
  Bottom Layer w0.127: v1@104.77,134.71 105.42,134.06 105.42,129.9 v1(105.9,129.4)
  other v1: 104.77,134.75
A4: R172.1 U2.P1 U14.29 U15.29 U16.29 U17.29 | length 66.5
  Top Layer w0.127: v1(61.64,122.8) 61.92,122.82 62.3,122.44 71.34,122.44 71.74,122.04 76.68,122.04 77.08,122.44 U17.29@79.458,122.44 80.04,122.44 80.26,122.44 80.406,122.294 80.74,122.294 80.994,122.04 91.86,122.04 92.26,122.44 94.46,122.44 U14.29@95.206,122.44 95.346,122.3 96.82,122.3 97.08,122.04 107.44,122.04 107.986,122.586 108.934,122.586 109.08,122.44 U16.29@111.462,122.44 ; U15.29@63.082,122.56 U15.29@63.202,122.44 ; v1(98.02,123.18) 98.06,123.14 99.06,123.14 99.2,123 100.06,123 105.36,128.3 105.36,131.522 U2.P1@105.41,131.572
  Bottom Layer w0.127: R172.1@60.74,122.56 61.4,122.56 v1(61.64,122.8) ; v1(97.5,122.02) 97.5,122.401 98.02,122.921 v1(98.02,123.18)
A5: R172.2 U2.M4 U14.30 U15.30 U16.30 U17.30 | length 68.9
  Top Layer w0.127: v1(61.78,121.76) 61.84,121.76 61.96,121.64 U15.30@63.202,121.64 70.94,121.64 71.34,121.24 76.74,121.24 77.14,121.64 80.614,121.64 81.014,121.24 91.919,121.24 92.319,121.64 96.36,121.64 96.76,121.24 107.26,121.24 107.406,121.386 108.426,121.386 108.68,121.64 U16.30@111.462,121.64 ; v1(99.5,123.48) 104.32,128.3 104.32,129.96 104.46,130.1 v1(104.46,130.16) ; U2.M4@102.87,135.382 102.87,135.37 v1(103.5,134.74)
  Bottom Layer w0.127: R172.2@60.74,121.76 v1(61.78,121.76) ; v1(98.76,121.24) 99.094,121.574 99.094,122.354 99.5,122.76 v1(99.5,123.48) ; v1(103.5,134.74) 104.14,134.1 104.14,130.48 v1(104.46,130.16)
A6: R172.3 U2.M3 U14.31 U15.31 U16.31 U17.31 | length 68.5
  Top Layer w0.127: v1(61.7,120.72) 62.02,120.84 U15.31@63.202,120.84 70.28,120.84 70.68,120.44 76.78,120.44 77.18,120.84 U17.31@79.458,120.84 80.6,120.84 81,120.44 88.008,120.44 88.288,120.72 88.946,120.72 89.226,120.44 92.04,120.44 92.44,120.84 96.361,120.84 96.761,120.44 107.26,120.44 107.406,120.294 108.154,120.294 108.846,120.986 110.074,120.986 110.22,120.84 U16.31@111.462,120.84 ; v1(98.84,123.82) 98.84,123.96 102.26,127.38 102.26,130 v1(102.92,130.66) ; U2.M3@102.87,134.112 102.87,134.11 v1(103.5,133.48)
  Bottom Layer w0.127: R172.3@60.74,120.96 61.46,120.96 v1(61.7,120.72) ; v1(98.08,120.44) 98.08,121.46 98.84,122.22 v1(98.84,123.82) ; v1(102.92,130.66) 103.5,131.24 v1(103.5,133.48)
A7: R172.4 U2.M1 U14.32 U15.32 U16.32 U17.32 | length 67.2
  Top Layer w0.127: v1(61.58,119.68) 61.84,119.68 62.2,120.04 U15.32@63.202,120.04 65.44,120.04 66.1,120.04 66.246,120.186 67.054,120.186 67.2,120.04 67.28,120.04 69.96,120.04 70.36,119.64 76.84,119.64 77.24,120.04 80.6,120.04 81,119.64 87.801,119.64 88.021,119.42 88.986,119.42 89.206,119.64 92.18,119.64 92.58,120.04 96.44,120.04 96.84,119.64 108.46,119.64 108.72,119.9 109.82,119.9 109.96,120.04 U16.32@111.462,120.04 ; v1(98.04,123.88) 101.88,127.72 101.88,130.52 102.87,131.51 U2.M1@102.87,131.572
  Bottom Layer w0.127: R172.4@60.74,120.16 61.1,120.16 v1(61.58,119.68) 61.64,119.66 v1@61.555,119.745 ; v1(97.38,119.62) 97.38,121.119 98.54,122.279 98.54,123.38 v1(98.04,123.88)
A8: R173.1 U2.Y10 U14.33 U15.33 U16.33 U17.33 | length 87.8
  Top Layer w0.127: v1@61.97,118.85 62.36,119.24 66.12,119.24 66.24,119.12 66.9,119.12 67.12,119.34 67.8,119.34 67.9,119.24 69.76,119.24 70.16,118.84 76.82,118.84 77.22,119.24 80.6,119.24 81,118.84 92.24,118.84 92.64,119.24 96.42,119.24 96.82,118.84 108.76,118.84 109.16,119.24 113.559,119.24 113.819,118.98 v3(119.48,118.98) ; U2.Y10@113.03,143.002 113.378,143.002 114.8,141.58 v1(114.86,141.58)
  Bottom Layer w0.127: R173.1@60.76,118.54 61.44,118.54 61.8,118.9 v1(61.92,118.9) ; v1(114.86,141.58) 115.58,141.58 116.545,140.615 ; 116.545,140.615 117.56,139.6 117.56,139.316 118.695,138.181 118.695,137.039 119.64,136.094 119.64,119.76 119.48,119.6 v3(119.48,118.98)
A9: R173.2 U2.W9 U14.34 U15.34 U16.34 U17.34 | length 92.9
  Top Layer w0.127: v1(61.88,118) 61.94,118 62.38,118.44 66.22,118.44 66.32,118.54 66.88,118.54 67.18,118.24 67.86,118.24 68.06,118.44 69.48,118.44 69.88,118.04 76.8,118.04 77.2,118.44 80.6,118.44 81,118.04 92.28,118.04 92.68,118.44 96.4,118.44 96.8,118.04 109.06,118.04 109.46,118.44 113.54,118.44 113.8,118.18 115.42,118.18 115.68,117.92 118.1,117.92 118.32,117.7 119.419,117.7 119.879,118.16 v3(120.7,118.16) ; U2.W9@111.76,141.732 111.808,141.732 112.46,141.08 113.26,141.08 114.386,139.954 116.06,139.954 116.446,140.34 v1(117.58,140.34)
  Bottom Layer w0.127: R173.2@60.76,117.74 61.34,117.74 61.6,118 v1(61.88,118) ; v1(117.58,140.34) 118.12,140.34 118.78,139.68 119.12,139.68 119.48,139.32 119.48,137.331 120.42,136.391 120.42,120.371 120.986,119.805 120.986,118.894 120.7,118.608 v3(120.7,118.16)
A10: R173.3 U2.Y8 U14.22 U15.22 U16.22 U17.22 | length 90.7
  Top Layer w0.127: v1(66.66,119.64) 69.719,119.64 70.119,119.24 76.839,119.24 77.239,119.64 80.6,119.64 81,119.24 87.842,119.24 87.922,119.16 89.2,119.16 89.28,119.24 92.24,119.24 92.64,119.64 96.44,119.64 96.986,119.094 99.394,119.094 99.54,119.24 U14.22@106.306,119.24 108.62,119.24 109.02,119.64 119.94,119.64 120.34,119.24 U16.22@122.562,119.24 ; U2.Y8@113.03,140.462 113.378,140.462 114.14,139.7 118,139.7 v1(118.08,139.62)
  Bottom Layer w0.127: R173.3@60.76,116.94 61.12,116.94 61.66,117.48 62.18,117.48 64.34,119.64 v1(66.66,119.64) ; v1(118.08,139.62) 118.08,139.155 118.958,138.278 118.958,137.135 119.9,136.193 119.9,119.68 v3(120.12,119.46)
A11: R173.4 U2.W8 U14.35 U15.35 U16.35 U17.35 | length 92.4
  Top Layer w0.127: v1(61.78,116.82) 61.78,117.32 61.949,117.489 62.269,117.489 62.42,117.64 66.1,117.64 66.31,117.43 69.511,117.43 69.701,117.24 76.9,117.24 77.3,117.64 80.6,117.64 81,117.24 92.36,117.24 92.76,117.64 96.38,117.64 96.634,117.386 97.374,117.386 97.52,117.24 109.18,117.24 109.58,117.64 113.48,117.64 114.026,117.094 115.56,117.094 115.786,117.32 117.66,117.32 118,116.98 119.8,116.98 v3(119.98,117.16) ; U2.W8@111.782,140.462 U2.W8@111.76,140.462 111.76,140.46 112.4,139.82 113.44,139.82 113.814,139.446 116.08,139.446 116.446,139.08 v1(118.9,139.08)
  Bottom Layer w0.127: R173.4@60.76,116.14 61.1,116.14 v1(61.78,116.82) ; v1(118.9,139.08) 118.9,138.694 119.225,138.369 119.225,137.227 120.16,136.292 120.16,120.272 120.732,119.7 120.732,118.999 120.18,118.447 120.18,117.36 v3(119.98,117.16)
A12: R177.1 U2.V8 U14.36 U15.36 U16.36 U17.36 | length 86.2
  Top Layer w0.127: v1(61.86,116) 61.86,116.12 62.58,116.84 69.12,116.84 69.52,116.44 77.14,116.44 77.54,116.84 80.62,116.84 81.02,116.44 92.36,116.44 92.76,116.84 96.26,116.84 96.806,116.294 97.354,116.294 97.64,116.58 98.366,116.58 98.506,116.44 109.36,116.44 109.76,116.84 113.48,116.84 113.86,116.46 v3(116.04,116.46) ; U2.V8@110.49,140.462 111.12,139.832 v1(111.12,139.83)
  Bottom Layer w0.127: R177.1@60.96,114.3 61.22,114.3 61.86,114.94 v1(61.86,116) ; v1(111.12,139.83) 114.57,136.38 115.614,136.38 116.974,135.02 116.98,135.02 116.98,126.02 115.648,124.688 115.648,118.331 115.96,118.019 115.96,116.54 v3(116.04,116.46)
A13: R177.2 U2.U8 | length 87
  Top Layer w0.127: v1(65.28,113.8) 68.36,113.8 68.92,113.24 75.28,113.24 75.96,113.92 77.94,113.92 78.62,113.24 80.8,113.24 80.94,113.1 86.62,113.1 87.56,114.04 93.46,114.04 94.26,113.24 96.8,113.24 96.92,113.12 101.22,113.12 101.4,113.3 104.82,113.3 104.88,113.24 108,113.24 108.167,113.407 109.973,113.407 110.14,113.24 112.68,113.24 v1(113.24,113.8) ; U2.U8@109.22,140.462 v1@109.85,139.832
  Bottom Layer w0.127: R177.2@60.96,113.5 61.52,113.5 61.82,113.8 v1(65.28,113.8) ; v1@109.85,139.81 110.54,139.12 111.34,139.12 114.34,136.12 115.479,136.12 116.72,134.879 ; v1(113.24,113.8) 113.24,114.84 115.66,117.26 115.66,117.96 115.394,118.226 115.394,124.894 116.72,126.22 116.72,134.879
  other v1: 109.85,139.83
A14: R177.3 U2.V7 U14.20 U15.20 U16.20 U17.20 | length 92.9
  Top Layer w0.127: v1(66.66,117.96) 69.34,117.96 69.66,117.64 76.759,117.64 77.159,118.04 80.6,118.04 81,117.64 92.299,117.64 92.699,118.04 96.4,118.04 96.8,117.64 109.08,117.64 109.48,118.04 113.44,118.04 113.84,117.64 118.02,117.64 118.32,117.34 119.418,117.34 119.758,117.68 120.128,117.68 120.168,117.64 U16.20@122.562,117.64 ; U2.V7@110.49,139.192 v1@111.12,138.562
  Bottom Layer w0.127: R177.3@60.96,112.7 61.3,112.7 61.78,113.18 65.6,113.18 66.66,114.24 v1(66.66,117.96) ; v1(111.12,138.56) 111.159,138.56 113.859,135.86 115.38,135.86 116.46,134.78 116.46,126.4 115.14,125.08 v3(115.14,117.64)
A15: R177.4 U2.Y5 U14.21 U15.21 U16.21 U17.21 | length 90.8
  Top Layer w0.127: v1(67.48,118.78) 69.499,118.78 69.839,118.44 76.779,118.44 77.179,118.84 80.559,118.84 80.959,118.44 92.26,118.44 92.66,118.84 96.359,118.84 96.759,118.44 108.9,118.44 109.3,118.84 113.499,118.84 113.779,118.56 115.46,118.56 115.58,118.44 117.94,118.44 118.4,117.98 119.34,117.98 120.06,118.7 121.1,118.7 121.36,118.44 U16.21@122.562,118.44 ; U2.Y5@113.03,136.652 114.592,136.652 v1(114.84,136.9)
  Bottom Layer w0.127: R177.4@60.96,111.9 64.78,111.9 67.48,114.6 v1(67.48,118.78) ; v1(114.84,136.9) 115.46,136.9 117.24,135.12 117.24,125.921 116.3,124.981 v3(116.3,118.44)
A16: R180.4 U2.D8 | length 55.3
  Top Layer w0.127: R180.4@44.336,128.016 44.336,129.556 47.94,133.16 80.502,133.16 84.1,136.757 84.1,137.74 84.902,138.542 87.482,138.542 v1(87.76,138.82) 87.732,139.16 ; v1@92.08,139.832 U2.D8@92.71,140.462
  Bottom Layer w0.127: v1(87.76,138.82) 90.2,138.82 90.54,139.16 91.46,139.16 v1@92.08,139.78
  other v1: 92.08,139.824
A17: R180.3 U2.A6 | length 48.9
  Top Layer w0.127: R180.3@45.136,128.016 45.136,128.756 48,131.62 52.8,131.62 53.44,132.26 80.68,132.26 84.885,136.465 84.885,137.445 85.22,137.78 88.758,137.78 U2.A6@88.9,137.922
A18: R179.2 U2.A3 | length 29.8
  Top Layer w0.127: R179.2@65.024,128.816 65.704,128.816 66.2,128.32 78.901,128.32 82.021,131.44 85.66,131.44 86.6,130.5 87.2,130.5 87.36,130.66 87.36,131.42 v1(87.1,131.82) ; v1(87.552,134.112) U2.A3@88.9,134.112
  Bottom Layer w0.127: v1(87.1,131.82) 86.58,132.34 86.58,133 87.552,133.972 v1(87.552,134.112)
A19: R179.3 U2.D5 | length 34.8
  Top Layer w0.127: R179.3@65.024,129.616 65.624,129.616 66.666,128.574 78.796,128.574 82.382,132.16 85.8,132.16 v1(86.84,131.12) ; v1@92.08,136.022 U2.D5@92.71,136.652
  Bottom Layer w0.127: v1(86.84,131.12) 86.32,131.64 86.32,133.099 87,133.779 87,134.78 87.54,135.32 91.4,135.32 v1@92.08,136
  other v1: 92.08,136.014
A20: R179.4 U2.C3 | length 29.3
  Top Layer w0.127: R179.4@65.024,130.416 65.418,130.416 67.006,128.828 78.69,128.828 82.462,132.6 v1(87.1,132.6) ; v1(90.81,133.474) 90.81,133.482 U2.C3@91.44,134.112
  Bottom Layer w0.127: v1(87.1,132.6) 88.42,132.6 89.294,133.474 v1(90.81,133.474)
A21: R178.3 U2.K3 | length 53.1
  Top Layer w0.127: R178.3@60.96,126.568 64.188,126.568 64.58,126.96 79.6,126.96 v1(79.9,127.26) ; v1(81.68,122.96) 81.946,122.694 89.074,122.694 89.22,122.84 91.66,122.84 92.46,123.64 97.06,123.64 101.28,127.86 v1(101.28,128.9) ; U2.K3@100.33,134.112 100.96,133.482 v1(100.96,133.48)
  Bottom Layer w0.127: v1(79.9,127.26) 79.9,125.086 79.88,125.066 79.88,124.62 80.14,124.36 80.641,124.36 81.68,123.321 v1(81.68,122.96) ; v1(100.96,133.48) 100.94,129.32 v1(101.28,128.9)
A22: R178.1 U2.K1 | length 46.6
  Top Layer w0.127: R178.1@60.96,124.968 63.633,124.968 64.764,123.837 79.349,123.837 79.546,123.64 82.279,123.64 82.505,123.866 89.474,123.866 89.7,123.64 91.24,123.64 91.5,123.9 96.961,123.9 98.592,125.531 98.592,126.252 100.68,128.34 v1(100.72,128.34) ; v1(99.98,129.86) 100.28,130.16 100.28,131.34 100.33,131.39 U2.K1@100.33,131.572 100.348,131.572 U2.K1@100.36,131.56
  Bottom Layer w0.127: v1(99.98,129.86) 99.98,129.314 100.72,128.574 v1(100.72,128.34)
A23: R178.2 U2.E1 | length 45.3
  Top Layer w0.127: R178.2@60.96,125.768 63.192,125.768 64.86,124.1 79.52,124.1 79.72,123.9 82.18,123.9 82.4,124.12 89.6,124.12 89.82,123.9 91.14,123.9 91.4,124.16 96.42,124.16 v1(96.68,124.42) ; v1(93.98,129) 93.98,130.12 94.12,130.26 94.12,131 93.98,131.14 U2.E1@93.98,131.572
  Bottom Layer w0.127: v1(93.98,129) 93.98,128.579 96.2,126.359 96.2,124.9 v1(96.68,124.42)
A24: R179.1 U2.D1 | length 40.5
  Top Layer w0.127: R179.1@65.024,128.016 78.956,128.016 79.54,128.6 v1(80.82,128.6) ; v1(90.92,124.42) 94.88,124.42 v1(95.14,124.68) ; v1(92.42,129.1) 92.42,130.74 92.71,131.03 U2.D1@92.71,131.572
  Bottom Layer w0.127: v1(80.82,128.6) 81.3,128.6 81.684,128.216 85.424,128.216 86.126,127.514 87.266,127.514 88.346,126.434 89.246,126.434 90.56,125.12 90.92,124.76 v1(90.92,124.42) ; v1(92.42,129.1) 92.42,128.586 94.652,126.354 94.652,125.168 v1(95.14,124.68)
A25: R178.4 U2.F4 | length 49.8
  Top Layer w0.127: R178.4@60.96,127.368 79.088,127.368 79.66,127.94 v1(80.24,127.94) ; v1(90,124.62) 90.322,124.942 94.662,124.942 94.92,125.2 v1(96.72,125.2) ; v1(94.62,134.744) 94.62,134.752 U2.F4@95.25,135.382
  Bottom Layer w0.127: v1(80.24,127.94) 84.78,127.94 84.8,127.96 85.32,127.96 86.02,127.26 87.16,127.26 88.24,126.18 89.14,126.18 89.74,125.58 90,125.32 v1(90,124.62) ; v1(94.62,134.744) 94.62,134.5 94,133.88 94,130.28 94.5,129.7 94.5,128.46 96.72,126.24 v1(96.72,125.2)
AA0: R171.8 U33.30 | length 2.2
  Top Layer w0.127: U33.30@56.13,120.637 57.177,120.637 57.373,120.44 R171.8@58.244,120.44
AA1: R171.7 U18.29 U33.31 | length 18.8
  Top Layer w0.127: U33.31@56.13,121.137 57.237,121.137 57.34,121.24 58.88,121.24 59.055,121.065 59.055,120.025 59.32,119.76 60.04,119.76 v1(60.46,119.34) ; v3(58.82,109.2) 59.88,110.26 v3(59.88,110.98)
  Bottom Layer w0.127: U18.29@57.526,108.073 57.526,108.686 58.04,109.2 v3(58.82,109.2) ; v3(59.88,110.98) 60.04,111.36 60.06,115.18 59.92,115.32 59.94,118.8 v1(60.46,119.34)
AA2: R171.6 U18.25 U33.32 | length 9.2
  Top Layer w0.127: v1(55.54,122.34) 55.174,121.974 55.174,121.726 55.263,121.637 57.317,121.637 57.72,122.04 R171.6@58.244,122.04
  Bottom Layer w0.127: v1(55.54,122.34) 56.026,122.826 U18.25@56.026,127.273
AA3: R171.5 U18.24 U33.33 | length 11.2
  Top Layer w0.127: v1(54.102,121.761) 54.28,121.939 U33.33@54.28,123.487 ; v1(55.5,123.24) 57.14,123.24 57.54,122.84 R171.5@58.244,122.84
  Bottom Layer w0.127: v1(54.102,121.761) 54.102,121.842 v1(55.5,123.24) ; 55.5,123.599 v1(55.5,123.24) ; U18.24@55.526,127.273 55.526,123.625 v1(55.5,123.24)
AA4: R172.8 U18.23 U33.34 | length 15.7
  Top Layer w0.127: v1(53.702,120.941) 53.56,121.082 53.56,122.1 53.78,122.32 U33.34@53.78,123.487
  Bottom Layer w0.127: U18.23@55.026,127.273 55.026,124.386 53.582,122.942 53.582,121.061 v1(53.702,120.941) 55.401,120.941 57.02,122.56 R172.8@59.04,122.56
AA5: R172.7 U18.22 U33.35 | length 17.6
  Top Layer w0.127: U33.35@53.28,123.487 53.28,121.28 53.16,121.16 53.16,120.692 53.52,120.332 v1(53.52,120.14)
  Bottom Layer w0.127: U18.22@54.526,127.273 54.526,124.325 53.282,123.081 53.282,121.302 53.16,121.18 53.16,120.692 53.52,120.332 v1(53.52,120.14) 55.44,120.14 57.06,121.76 R172.7@59.04,121.76
AA6: R172.6 U18.21 U33.38 | length 17.9
  Top Layer w0.127: U33.38@51.78,123.487 51.78,121.443 v1(51.782,121.441)
  Bottom Layer w0.127: U18.21@54.026,127.273 54.026,124.265 51.782,122.021 v1(51.782,121.441) 52.18,121.042 52.18,120.22 52.8,119.6 55.5,119.6 56.86,120.96 R172.6@59.04,120.96